# Altium PCB PCB_Microfonos.PcbDoc
Units mil, origin at the board's own origin, x right, y up, seen from the top; angles counter-clockwise.
Board outline 1968.5 x 1968.5 mil, 2 copper layers (Top Layer, Bottom Layer); 36 components, 19 nets, 90 pads, 0 vias.
Unrouted connection lines stored in the file: 63.
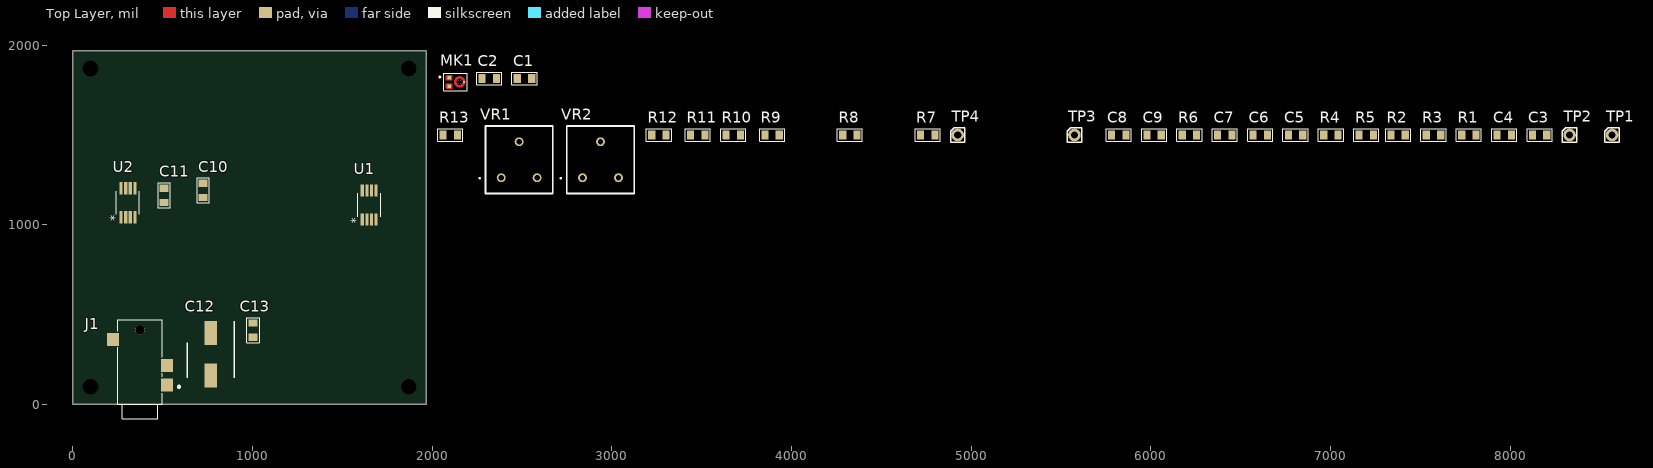
[diagram p0: Top Layer view]
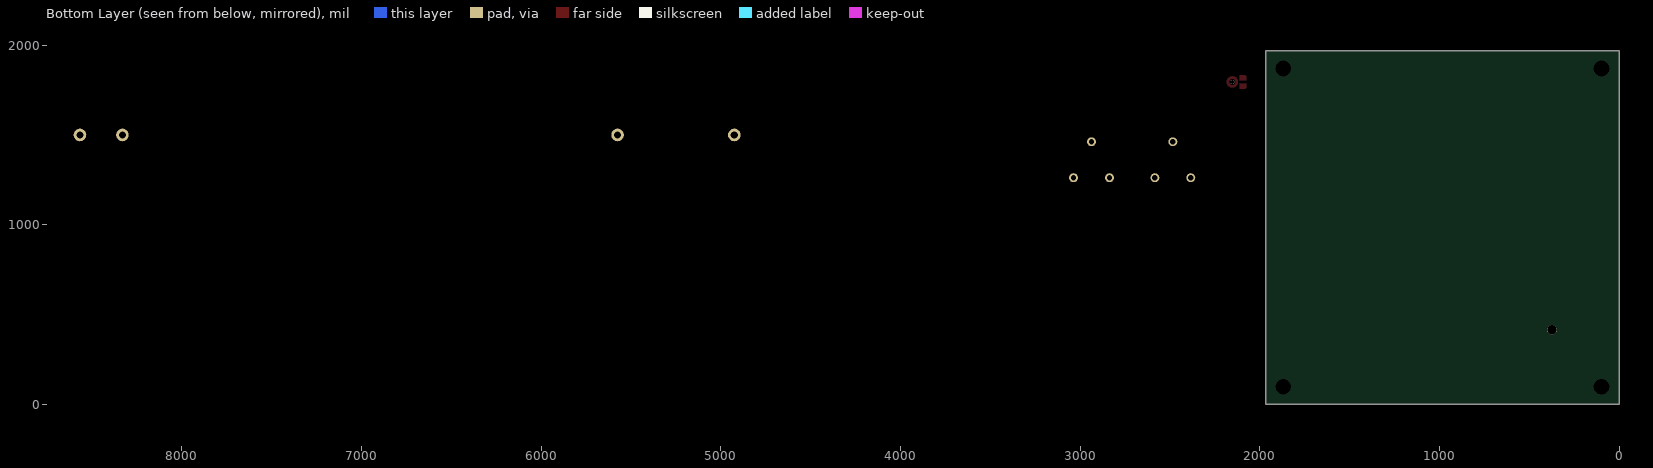
[diagram p1: Bottom Layer view, seen from below]

## Layer stack, top to bottom
Top Solder: solder mask 0.4, Solder Resist, Dk 3.5
Top Layer: signal copper 1.4
Dielectric 1: dielectric 12.6, FR-4, Dk 4.8
Bottom Layer: signal copper 1.4
Bottom Solder: solder mask 0.4, Solder Resist, Dk 3.5

## Board outline
0,0 0,1968.5 1968.5,1968.5 1968.5,0

## Design rules (kind name [scope] priority, off if disabled: settings)
Clearance [All] p1: gap=10 ignorepadtopadclearanceinfootprint=FALSE except(0: Arc-Hole Track-Hole SMDPad-Hole THPad-Hole Via-Hole Fill-Hole Poly-Hole Region-Hole Text-Hole)
HoleSize [All] p1: absolutevalues=TRUE maxlimit=248.03 minlimit=7.87 maxpercent=80.000 minpercent=20.000
PolygonConnect [All] p1: connectstyle=Relief reliefconductorwidth=10 reliefentries=4 polygonreliefangle="90 Angle" airgapwidth=10
RoomDefinition MICROFONO [InComponentClass('MICROFONO')] p1: confinementstyle=ConfineIn formatcopy=TRUE lockcomponents=FALSE outline 2011.8,1716.53 2602.36,1716.53 2602.36,1972.43 2011.8,1972.43
RoomDefinition "FILTRADO Y AMPLIFICACION" [InComponentClass('FILTRADO Y AMPLIFICACION')] p2: confinementstyle=ConfineIn formatcopy=TRUE lockcomponents=FALSE outline 2011.8,1145.66 8704.7,1145.66 8704.7,1677.16 2011.8,1677.16
RoomDefinition CONECTOR [InComponentClass('CONECTOR')] p3: confinementstyle=ConfineIn formatcopy=TRUE lockcomponents=FALSE outline 2011.8,62.99 3192.9,62.99 3192.9,1086.61 2011.8,1086.61
RoutingVias [All] p1: holewidth=28 width=50 viastyle="Through Hole" minholewidth=7.87 minwidth=17.72 maxholewidth=28 maxwidth=50
SolderMaskExpansion [All] p1: expansion=4 istentingtop=FALSE
Width [All] p1: maxlimit=10 minlimit=5 preferedwidth=10
29 further rules are at their usual default settings.

## Classes and differential pairs
component class MICROFONO: C1 C2 MK1
component class "FILTRADO Y AMPLIFICACION": C3 C4 C5 C6 C7 C8 C9 C10 C11 R1 R2 R3 R4 R5 R6 R7 R8 R9 R10 R11 R12 R13 TP1 TP2 TP3 TP4 U1 U2 VR1 VR2
component class CONECTOR: C12 C13 J1

## Components (designator, comment, footprint, x,y, rotation, side; value= is the part's Value field where it differs from the comment)
C1 "100nF" 0805C-TBD 2484.24,1814.95 r0 top
C2 "100p" 0805C-GENERIC 2287.39,1814.95 r0 top
C3 "3.6n" 0805C-GENERIC 8133.84,1499.99 r0 top
C4 "5.6n" 0805C-GENERIC 7936.99,1499.99 r0 top
C5 "3u" 0805C-GENERIC 6775.57,1499.99 r0 top
C6 "360p" 0805C-GENERIC 6578.73,1499.99 r0 top
C7 "470p" 0805C-GENERIC 6381.88,1499.99 r0 top
C8 "100n" 0805C-GENERIC 5791.32,1499.99 r0 top
C9 "100p" 0805C-GENERIC 5988.18,1499.99 r0 top
C10 "100n" 0805C-GENERIC 724.41,1161.42 r90 top
C11 "100p" 0805C-GENERIC 507.87,1133.86 r90 top
C12 "EEE-HC1C101XP" CAPAE660X800N 767.72,279.53 r270 top
C13 "10u" 0805C-GENERIC 1003.94,444.02 r270 top
J1 "SJ2-35953A-SMT-TR" CUI_SJ2-35953A-SMT-TR 374.02,236.22 r90 top
MK1 "INMP510" XDCR_INMP510 2129.91,1795.27 r0 top
R1 "110k" 0805R-GENERIC 7740.14,1499.99 r0 top
R2 "1.6k" 0805R-GENERIC 7346.44,1499.99 r0 top
R3 "47k" 0805R-GENERIC 7543.29,1499.99 r0 top
R4 "5.1k" 0805R-GENERIC 6972.43,1499.99 r0 top
R5 "5.1k" 0805R-GENERIC 7169.27,1499.99 r0 top
R6 "1.8k" 0805R-GENERIC 6185.02,1499.99 r0 top
R7 "62k" 0805R-GENERIC 4728.34,1499.99 r0 top
R8 "51k" 0805R-GENERIC 4295.27,1499.99 r0 top
R9 "20k" 0805R-GENERIC 3862.19,1499.99 r0 top
R10 "2k" 0805R-GENERIC 3645.66,1499.99 r0 top
R11 "10k" 0805R-GENERIC 3448.81,1499.99 r0 top
R12 "5.6k" 0805R-GENERIC 3232.27,1499.99 r0 top
R13 "820" 0805R-GENERIC 2070.86,1499.99 r0 top
TP1 "LPFE1" TESTPIN 8566.91,1499.99 r0 top
TP2 "LPFE2" TESTPIN 8330.69,1499.99 r0 top
TP3 "AMP" TESTPIN 5574.79,1499.99 r0 top
TP4 "HPF" TESTPIN 4925.19,1499.99 r0 top
U1 "Part Number: ADA4661-2ARMZ-R7" RM_8 1649.61,1110.24 r90 top value=Value
U2 "Part Number: ADA4661-2ARMZ-R7" RM_8 307.09,1122.05 r90 top value=Value
VR1 "3310Y-001-102L" 3310Y-001 2484.24,1362.2 r0 top
VR2 "3310Y-001-103L" 3310Y-001 2937,1362.2 r0 top

## Footprints (in the part's own frame and the unit in brackets; to place one, negate y for a bottom-side part, rotate by r counter-clockwise, add the part's x,y. Pads: shape width x height; smd on the part's side, far side on the other; paste and mask are expansions set on the pad)
0805C-GENERIC [mil] "CAPACITOR 0805"
  rect 40x50 smd: 1(-10,0) 2(70,0)
  silkscreen extent -40,-35 100,35, body extent -11,-25 70,25, height 26
0805C-TBD [mil] "CAPACITOR 0805"
  rect 40x50 smd: 1(-10,0) 2(70,0)
  silkscreen extent -40,-35 100,35, body extent -11,-25 70,25, height 26
0805R-GENERIC [mil] "RESISTOR 0805"
  rect 40x50 smd: 1(-10,0) 2(70,0)
  silkscreen extent -40,-35 100,35, body extent -11,-25 70,25, height 27
3310Y-001 [mm]
  round 1.26 hole 0.76: 1(-2.54,-2.54) 2(0,2.54) 3(2.54,-2.54)
  silkscreen extent -5.65,-4.76 4.76,4.76, body extent -4.7,-4.76 4.83,4.76, height 6.38
CAPAE660X800N [mm]
  rect 3.4x1.8 smd: 1(-3,0) 2(3,0)
  silkscreen extent -4.7,-3.3 3.3,3.3, body extent -3.9,-3.4 3.9,3.4, height 8
CUI_SJ2-35953A-SMT-TR [mm]
  rect 1.8x1.65 smd: 1(-3.25,-3.825) 2(3.2,3.825) 3(-0.5,-3.825)
  round 1.3 hole 1.3 unplated: ""(4.55,0)
  silkscreen extent -8,-5.65 6,3.15
RM_8 [mm]
  rect 1.761x0.451 smd paste+0 mask+0: 1(-2.05,0.975) 2(-2.05,0.325) 3(-2.05,-0.325) 4(-2.05,-0.975) 5(2.05,-0.975) 6(2.05,-0.325) 7(2.05,0.325) 8(2.05,0.975)
  silkscreen extent -1.63,-1.63 1.63,1.63, body extent 0,0 0.25,0.25, height 0.25
TESTPIN [mil]
  round 70 hole 40: 1(0,0)
  silkscreen extent -40,-40 40,40, body extent -40,-40 40,40, height 470
XDCR_INMP510 [mm]
  rect 0.5x0.5 smd paste-1 mask+0: 1(-0.905,0.6) 2(-0.905,-0.6)
  rect 0.25x0.25 smd paste-1 mask+0: 3(1.215,0)
  round 0.6 hole 0.6 unplated: ""(0.595,0)
  Top Layer region: -0.475,0.27 -1.375,0.27 -1.375,0.79 -1.215,0.95 -0.475,0.95
  Top Layer region: -0.475,-0.95 -1.215,-0.95 -1.375,-0.79 -1.375,-0.27 -0.475,-0.27
  Top Layer region: 248 vertices and 0 holes, not listed, extent -0.18,-0.77 1.37,0.77
  silkscreen extent -2.3,-1.25 1.68,1.25

## Part data
C1: library part 0805C-100nF-25V-X7R-MUR, "CAPACITOR 0805 CERAMIC", Supplier Part Number 1=490-1673-1-ND, Supplier 1=Digi-Key
C2 C3 C4 C5 C6 C7 C8 C9 C10 C11 C13: library part C0805-GENERIC, "GENERIC CAPACITOR NON POLARISED0603"
C12: "Capacitor Polarised", Manufacturer_Name=Panasonic, Mouser Part Number=667-EEE-HC1C101XP, Allied Price/Stock=https://www.alliedelec.com/panasonic-eee-hc1c101xp/70258549/, Allied_Number=70258549, Datasheet Link=http://industrial.panasonic.com/www-cgi/jvcr13pz.cgi?E+PZ+3+ABA0109+EEEHC1C101XP+7+WW, Height=8mm, Manufacturer_Part_Number=EEE-HC1C101XP, Mouser Price/Stock=https://www.mouser.com/Search/Refine.aspx?Keyword=667-EEE-HC1C101XP
J1: "3.5 mm, Stereo, Right Angle, Surface Mount _SMT_, Audio Jack Connector", Package=None, Availability=Unavailable, CUI_purchase_URL=https://www.cuidevices.com/product/interconnect/connectors/audio-connectors/jacks/sj2-3595x-smt-series?utm_source=snapeda.com&utm_medium=referral&utm_campaign=snapedaBOM, MF="CUI Devices", MP=SJ2-35953A-SMT-TR, Price=None, SnapEDA_Link=https://www.snapeda.com/parts/SJ2-35953A-SMT-TR/CUI%20Devices/view-part/701771/?ref=snap
MK1: "60Hz ~ 20kHz Analog Microphone MEMS _Silicon_ 1.5V ~ 3.63V Omnidirectional _-38dB Â±2dB @ 94dB SPL_ Solder Pads", Package="LGA-3 TDK-InvenSense", Digi-Key_Part_Number=1428-1016-2-ND, Digi-Key_Purchase_URL=https://www.digikey.com/product-detail/en/tdk-invensense/INMP510ACEZ-R7/1428-1016-2-ND/4311534?utm_source=snapeda&utm_medium=aggregator&utm_campaign=symbol, MF="TDK InvenSense", MP=INMP510, SnapEDA_Link=https://www.snapeda.com/parts/INMP510/TDK%20InvenSense/view-part/2757133/?ref=snap
R1 R2 R3 R4 R5 R6 R7 R8 R9 R10 R11 R12 R13: library part R0805-GENERIC, "GENERIC RESISTOR 0805"
TP1 TP2 TP3 TP4: library part TESTPIN, "TESTPIN SINGLE PIN HEADER", Manufacturer 1="Sharon Long Industries", Manufacturer Part Number 1=Cut-it-yourself, Supplier 1 Part number=Cut-It-Yourself, Reel=TH, Supplier 1="Sharon Long Industries"
U1 U2: library part ADA4661-2ARMZ-R7, "No Description Available", Built_By=EMA_Christopher, Copyright="Copyright (C) 2016 Accelerated Designs. All rights reserved", Manufacturer_Part_Number=ADA4661-2ARMZ-R7, RefDes=RefDes, Type=DEV, Vendor="Analog Devices Inc"
VR1: library part 3310Y-001-103L, "Variable Resistor", Manufacturer_Name=Bourns, Mouser Part Number=652-3310Y-001-103L, RS Part Number=5220625P, Datasheet Link=http://www.bourns.com/docs/Product-Datasheets/3310.pdf, Manufacturer_Part_Number=3310Y-001-103L, Mouser Price/Stock=https://www.mouser.com/Search/Refine.aspx?Keyword=652-3310Y-001-103L, RS Price/Stock=http://uk.rs-online.com/web/p/products/5220625P
VR2: "Variable Resistor", Manufacturer_Name=Bourns, Mouser Part Number=652-3310Y-001-103L, RS Part Number=5220625P, Datasheet Link=http://www.bourns.com/docs/Product-Datasheets/3310.pdf, Manufacturer_Part_Number=3310Y-001-103L, Mouser Price/Stock=https://www.mouser.com/Search/Refine.aspx?Keyword=652-3310Y-001-103L, RS Price/Stock=http://uk.rs-online.com/web/p/products/5220625P

## Free pads (board coordinates)
  round 60 hole 86.6 unplated: ""(98.43,98.43) ""(98.43,1870.08) ""(1870.08,98.43) ""(1870.08,1870.08)

## Nets (pads, with @x,y where several pads share a name; then routed paths per layer and width w, separated by ;. In a path a pad name is that pad's centre, name@x,y a point inside that pad or via, vN(x,y) a via of type N, cw(c..) or ccw(c..) an arc to the next point about the centre after c; other vN are vias at no path point)
GND: C1.2 C2.2 C6.1 C7.1 C8.2 C9.2 C10.2 C11.2 J1.1 MK1.3 R6.2 R10.2 R13.2 U1.4 U2.4
In_E1: C6.2 R3.2 U2.3
In_E2: C7.2 R5.2 U2.5
In_HP: C5.2 R1.2 R6.1 U1.3
NetC3_1: C3.1 R2.2 R3.1
NetC4_1: C4.1 R4.2 R5.1
NetC5_1: C5.1 MK1.2
NetC12_2: C12.2 C13.2
NetR7_2: R7.2 R10.1 U1.2
NetR8_2: R8.2 U2.2
NetR9_2: R9.2 U1.6 VR2.2
NetR11_2: R11.2 U2.6
NetR12_1: R12.1 U1.5
NetR13_1: R13.1 VR1.2 VR2.1
Out_A: R2.1 R9.1 TP3.1 U1.7
Out_E1: C3.2 R4.1 R8.1 TP1.1 U2.1
Out_E2: C4.2 J1.2 R11.1 TP2.1 U2.7
Out_HP: R7.1 R12.2 TP4.1 U1.1
VCC: C1.1 C2.1 C8.1 C9.1 C10.1 C11.1 C12.1 C13.1 J1.3 MK1.1 R1.1 U1.8 U2.8 VR1.1
pads on no net: J1. MK1. VR1.3 VR2.3

## Text inside footprints (layer, text, board x,y; h text height)
J1: Mechanical 13 "PCB Edge" at 97.89,-383.09 h50.1 r90
U1: Top Overlay "*" at 1598.47,1007.03 h50 r90; Mechanical 13 "*" at 1643.55,1053.68 h50 r90
U2: Top Overlay "*" at 255.95,1018.84 h50 r90; Mechanical 13 "*" at 301.03,1065.49 h50 r90